# EAGLE board MonitorSwitcher (EAGLE 9.6.2)
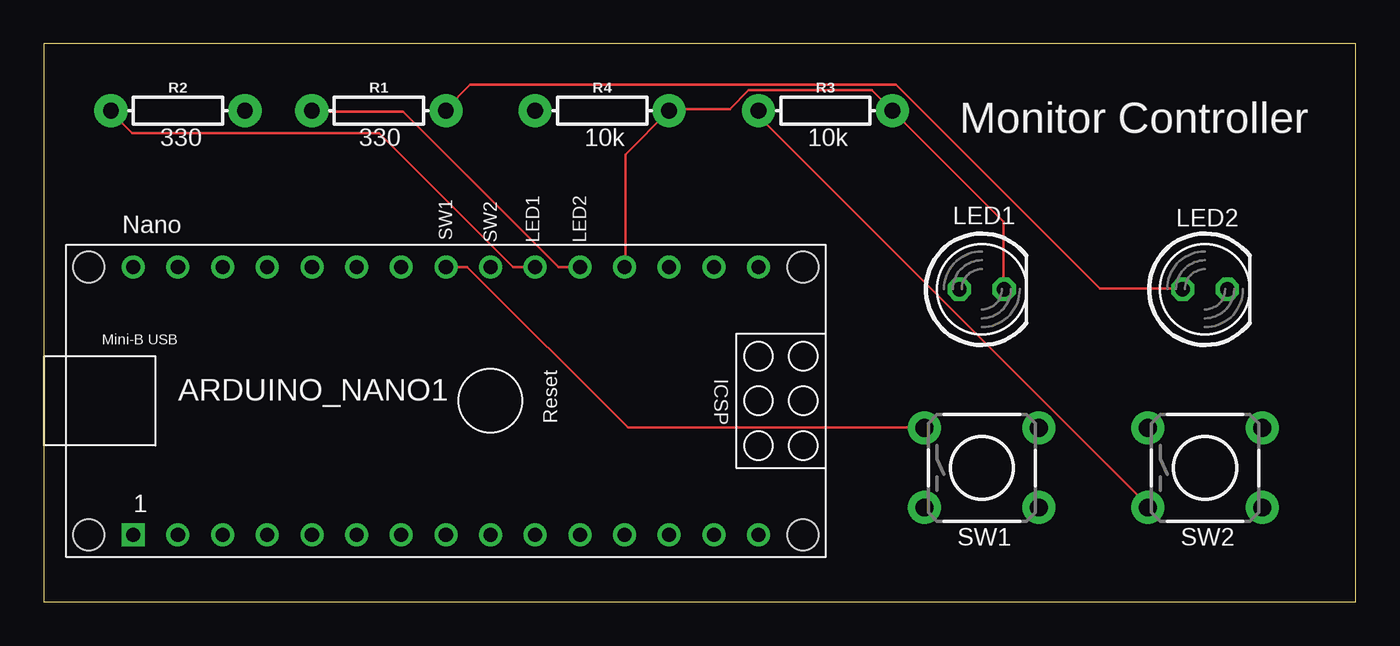
[diagram p0: board, top side]
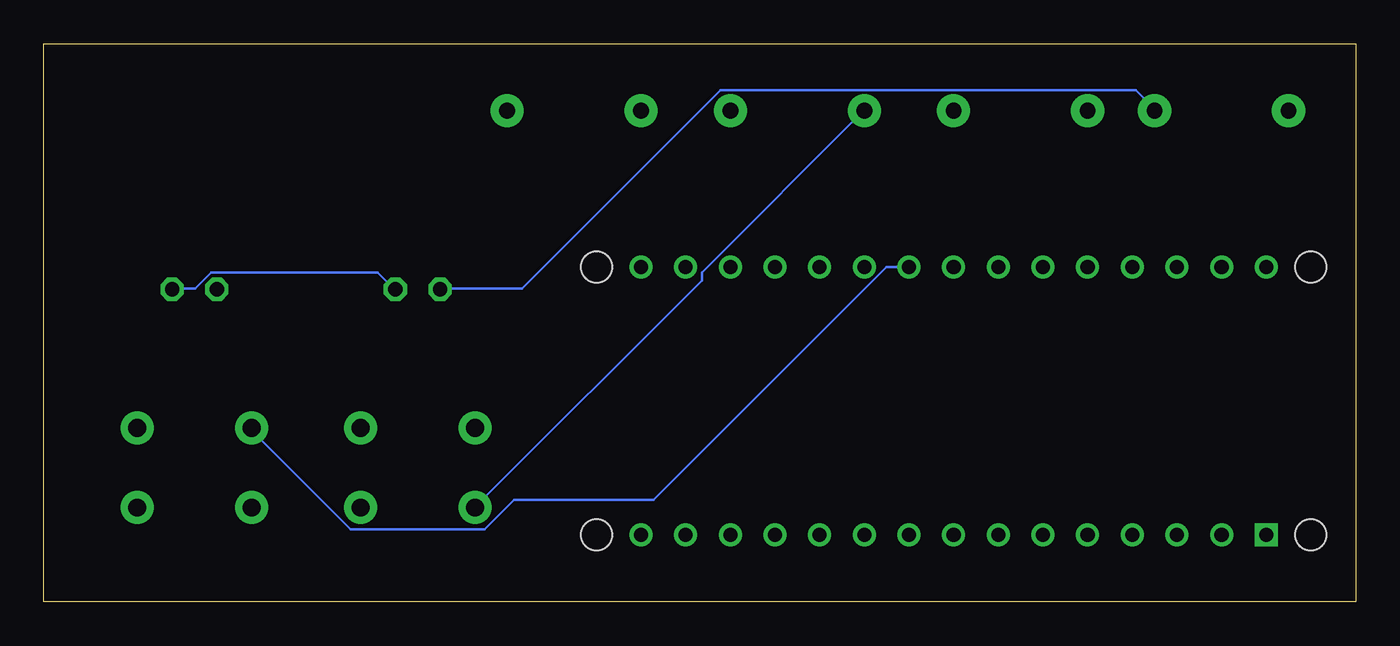
[diagram p1: board, bottom side, seen from below]

Size 74.6 x 31.74 mm. Coordinates in mm from the lower left corner, seen from the top.
Outline: 0,0 74.6,0 74.6,31.74 0,31.74 0,0
Copper layers (1*16): Top 0.035mm / dielectric 1.5mm / Bottom 0.035mm
Design rules "default": minimum track width 6mil, minimum drill 0.35mm, track to track 6mil, track to pad 6mil, pad to pad 6mil, via to via 6mil, smd to smd 6mil, copper to edge 40mil, drill to drill 6mil, minimum pad ring 10mil, minimum via ring 8mil, stop-mask expansion 4mil, vias tented up to drill 0mil, thermal gap 10mil

## Footprints (pad centres in the part's own frame; a part is rotated, then mirrored left to right if it is on the bottom)
ARDUINO_NANO = drill 0.8 square: 1 -20.32,-7.62 | drill 0.8: 2 -17.78,-7.62; 3 -15.24,-7.62; 4 -12.7,-7.62; 5 -10.16,-7.62; 6 -7.62,-7.62; 7 -5.08,-7.62; 8 -2.54,-7.62; 9 0,-7.62; 10 2.54,-7.62; 11 5.08,-7.62; 12 7.62,-7.62; 13 10.16,-7.62; 14 12.7,-7.62; 15 15.24,-7.62; 16 15.24,7.62; 17 12.7,7.62; 18 10.16,7.62; 19 7.62,7.62; 20 5.08,7.62; 21 2.54,7.62; 22 0,7.62; 23 -2.54,7.62; 24 -5.08,7.62; 25 -7.62,7.62; 26 -10.16,7.62; 27 -12.7,7.62; 28 -15.24,7.62; 29 -17.78,7.62; 30 -20.32,7.62 | hole 1.778: -22.86,-7.62; -22.86,7.62; 17.78,7.62; 17.78,-7.62
LED5MM = drill 0.813 octagon: A -1.27,0; K 1.27,0
AXIAL-0.3 = drill 0.9 pad 1.88: P$1 -3.81,0; P$2 3.81,0
TACTILE_SWITCH_PTH_6.0MM = drill 1.016 pad 1.88: 1 -3.251,2.261; 2 3.251,2.261; 3 -3.251,-2.261; 4 3.251,-2.261

## Placement (x,y rotation side)
ARDUINO_NANO1  [ARDUINO_NANO]  25.4,11.43 0 top
LED1  [LED5MM]  66.04,17.78 0 top
LED2  [LED5MM]  53.34,17.78 0 top
R1  330  [AXIAL-0.3]  19.05,27.94 0 top
R2  330  [AXIAL-0.3]  7.62,27.94 0 top
R3  10k  [AXIAL-0.3]  44.45,27.94 0 top
R4  10k  [AXIAL-0.3]  31.75,27.94 0 top
S1  MOMENTARY-SWITCH-SPST-PTH-6.0MM  [TACTILE_SWITCH_PTH_6.0MM]  66.04,7.62 0 top
S2  MOMENTARY-SWITCH-SPST-PTH-6.0MM  [TACTILE_SWITCH_PTH_6.0MM]  53.34,7.62 0 top

## Library data of the parts
ARDUINO_NANO1 = ArduinoNanoV30
LED1 LED2 = led
R1 R2 = SparkFun-Resistors; PROD_ID: RES-8371
R3 R4 = SparkFun-Resistors; PROD_ID: RES-12183
S1 S2 = SparkFun-Switches; PROD_ID: SWCH-08441; SF_SKU: COM-00097

## Nets
5V: ARDUINO_NANO1.12
GND: ARDUINO_NANO1.14
N$1: LED1.A R1.P$2
N$2: ARDUINO_NANO1.19 LED1.K LED2.K R3.P$2 R4.P$2
N$3: ARDUINO_NANO1.20 R1.P$1
N$4: ARDUINO_NANO1.21 R2.P$1
N$5: LED2.A R2.P$2
N$6: ARDUINO_NANO1.22 S1.1
N$7: ARDUINO_NANO1.23 S2.1
N$8: R3.P$1 S1.3
N$9: R4.P$1 S2.3
VIN: ARDUINO_NANO1.15

## Tracks (layer width: path | path; a pad name or v marks a point on that pad's centre or on a via)
N$1
  Top 0.152: LED1.A 64.77,17.83 60.05,17.83 48.46,29.41 24.23,29.41 22.86,28.04 R1.P$2
N$2
  Top 0.152: ARDUINO_NANO1.19 33.07,19.05 33.07,25.45 R4.P$2 35.66,28.04 39.01,28.04 40.08,29.11 47.09,29.11 R3.P$2 54.56,21.64 54.56,17.83 LED2.K
  Bottom 0.152: LED1.K 67.21,17.83 65.99,17.83 65.08,18.75 55.63,18.75 54.71,17.83 LED2.K
N$3
  Top 0.152: ARDUINO_NANO1.20 29.26,19.05 20.42,27.89 15.24,27.89 R1.P$1
N$4
  Top 0.152: ARDUINO_NANO1.21 26.67,19.05 19.05,26.67 5.03,26.67 3.81,27.89 R2.P$1
N$5
  Bottom 0.152: LED2.A 51.97,17.83 47.4,17.83 36.12,29.11 12.5,29.11 11.43,28.04 R2.P$2
N$6
  Bottom 0.152: ARDUINO_NANO1.22 26.67,19.05 39.93,5.79 47.85,5.79 49.53,4.12 57.15,4.12 62.79,9.75 S1.1
N$7
  Top 0.152: ARDUINO_NANO1.23 24.08,19.05 33.22,9.91 49.99,9.91 S2.1
N$8
  Top 0.152: R3.P$1 40.69,27.89 40.69,27.58 62.79,5.49 S1.3
N$9
  Bottom 0.152: R4.P$1 28.04,27.89 37.19,18.75 37.19,18.29 49.99,5.49 S2.3

## Text on the board
tPlace: Monitor Controller | 330 | 330 | 10k | 10k | Nano | SW1 | LED1 | LED2 | SW2 | LED1 | LED2 | SW1 | SW2